# Altium PCB RFIN PCB.PcbDoc
Units mil, origin at the board's own origin, x right, y up, seen from the top; angles counter-clockwise.
Board outline 6000 x 4000 mil, 2 copper layers (Top Layer, Bottom Layer); 71 components, 44 nets, 178 pads, 0 vias.
Unrouted connection lines stored in the file: 120.
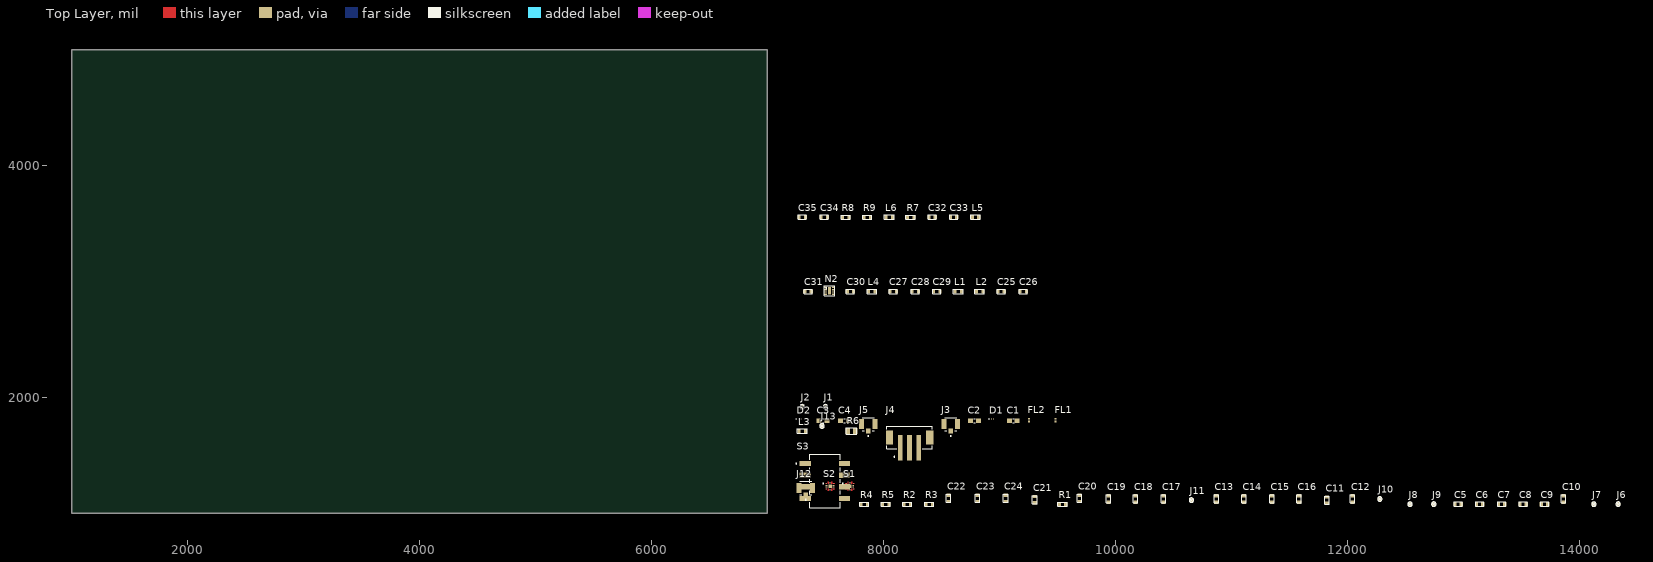
[diagram p0: Top Layer view]
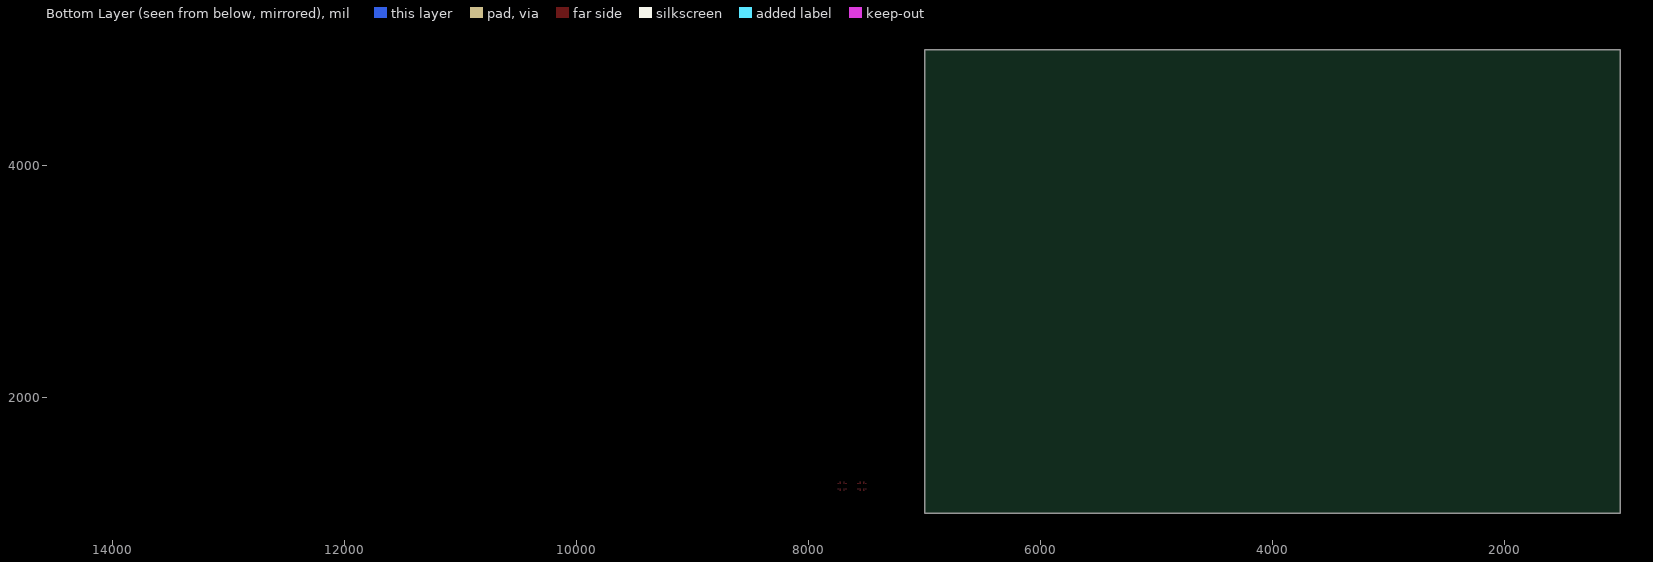
[diagram p1: Bottom Layer view, seen from below]

## Layer stack, top to bottom
Top Solder: solder mask 0.4, Solder Resist, Dk 3.5
Top Layer: signal copper 1.4
Dielectric 1: dielectric 12.6, FR-4, Dk 4.8
Bottom Layer: signal copper 1.4
Bottom Solder: solder mask 0.4, Solder Resist, Dk 3.5

## Board outline
1000,1000 7000,1000 7000,5000 1000,5000

## Design rules (kind name [scope] priority, off if disabled: settings)
Clearance [All] p1: gap=10 ignorepadtopadclearanceinfootprint=FALSE
PolygonConnect [All] p1: connectstyle=Relief reliefconductorwidth=10 reliefentries=4 polygonreliefangle="90 Angle" airgapwidth=10
RoutingVias [All] p1: holewidth=28 width=50 viastyle="Through Hole" minholewidth=28 minwidth=50 maxholewidth=28 maxwidth=50
SolderMaskExpansion [All] p1: expansion=4 istentingtop=FALSE
SupplyNets "Schematic Supply Nets_3" [InNet('3V3_IN')] p1: voltage=0.000
SupplyNets "Schematic Supply Nets_2" [InNet('5V_IN')] p2: voltage=0.000
SupplyNets "Schematic Supply Nets_1" [InNet('VDD_3V3')] p3: voltage=0.000
SupplyNets "Schematic Supply Nets" [InNet('GND')] p4: voltage=0.000
Width [All] p1: maxlimit=10 minlimit=10 preferedwidth=10
30 further rules are at their usual default settings.

## Classes and differential pairs
net class RF: NetC11_1 NetC11_2 NetC12_1 NetC12_2 NetC17_2 NetC18_1 NetC18_2 NetC19_1 NetC19_2 NetC20_1 NetC20_2 NetC22_2 NetC23_1 NetC23_2 NetC24_1 NetC24_2 NetC25_1 NetC25_2 NetC26_1 NetC26_2 NetC30_2 NetC31_2 NetC32_1 NetC32_2 NetC33_1 NetL5_1 NetR7_1
component class "RFOUT DaughterBoard": C1 C2 C3 C4 D1 D2 FL1 FL2 J1 J2 J3 J4 J5
component class FB: C5 C6 C7 C8 C9 C10 C11 C12 C13 C14 C15 C16 C17 C18 C19 C20 C21 C22 C23 C24 FL3 FL4 J6 J7 J8 J9 J10 J11 J12 N1 R1 R2 R3 R4 R5 S1 S2 S3
component class LNA: C25 C26 C27 C28 C29 C30 C31 C32 C33 C34 C35 J13 L1 L2 L3 L4 L5 L6 N2 R6 R7 R8 R9

## Components (designator, comment, footprint, x,y, rotation, side; value= is the part's Value field where it differs from the comment)
C1 "CC0603KRX5R9BB105" CAPC1608X90 9120,1800 r0 top
C2 "CC0603KRX5R9BB105" CAPC1608X90 8785,1800 r0 top
C3 "CC0603KRX5R9BB105" CAPC1608X90 7480,1800 r0 top
C4 "CC0603KRX5R9BB105" CAPC1608X90 7665,1800 r0 top
C5 "CAP_0603_100p" CAP_0603_UN1Q 12955,1080 r0 top value=100p
C6 "CAP_0603_1u_X7R" CAP_0603_UN1Q 13140,1080 r0 top value=1uF
C7 "CAP_0603_1u_X7R" CAP_0603_UN1Q 13330,1080 r0 top value=1uF
C8 "CAP_0603_1u_X7R" CAP_0603_UN1Q 13515,1080 r0 top value=1uF
C9 "CAP_0603_1u_X7R" CAP_0603_UN1Q 13700,1080 r0 top value=1uF
C10 "CAP_0603_100p" CAP_0603_UN1Q 13865,1125 r90 top value=100p
C11 "CAP_0603_100p" CAP_0603_UN1Q 11825,1115 r90 top value=100p
C12 "CAP_0603_100p" CAP_0603_UN1Q 12045,1125 r90 top value=100p
C13 "CAP_0603_100p" CAP_0603_UN1Q 10870,1125 r90 top value=100p
C14 "CAP_0603_100p" CAP_0603_UN1Q 11110,1125 r90 top value=100p
C15 "CAP_0603_100p" CAP_0603_UN1Q 11350,1125 r90 top value=100p
C16 "CAP_0603_100p" CAP_0603_UN1Q 11585,1125 r90 top value=100p
C17 "CAP_0603_100p" CAP_0603_UN1Q 10415,1125 r90 top value=100p
C18 "CAP_0603_100p" CAP_0603_UN1Q 10175,1125 r90 top value=100p
C19 "CAP_0603_100p" CAP_0603_UN1Q 9940,1125 r90 top value=100p
C20 "CAP_0603_100p" CAP_0603_UN1Q 9690,1130 r90 top value=100p
C21 "CAP_0603_NA" CAP_0603_UN1Q 9305,1120 r90 top value=NA
C22 "CAP_0603_NA" CAP_0603_UN1Q 8560,1130 r90 top value=NA
C23 "CAP_0603_100p" CAP_0603_UN1Q 8810,1130 r90 top value=100p
C24 "CAP_0603_100p" CAP_0603_UN1Q 9055,1130 r90 top value=100p
C25 "CAP_0603_1p" CAP_0603_UN1Q 9015,2915 r0 top value=1p
C26 "CAP_0603_1p" CAP_0603_UN1Q 9205,2915 r0 top value=1p
C27 "CAP_0603_1u_X7R" CAP_0603_UN1Q 8085,2915 r0 top value=1uF
C28 "CAP_0603_1u_X7R" CAP_0603_UN1Q 8275,2915 r0 top value=1uF
C29 "CAP_0603_1u_X7R" CAP_0603_UN1Q 8460,2915 r0 top value=1uF
C30 "CAP_0603_10p" CAP_0603_UN1Q 7715,2915 r0 top value=10p
C31 "CAP_0603_100p" CAP_0603_UN1Q 7350,2915 r0 top value=100p
C32 "CAP_0603_22p" CAP_0603_UN1Q 8420,3555 r0 top value=22p
C33 "CAP_0603_100p" CAP_0603_UN1Q 8605,3555 r0 top value=100p
C34 "CAP_0603_100p" CAP_0603_UN1Q 7490,3555 r0 top value=100p
C35 "CAP_0603_100p" CAP_0603_UN1Q 7300,3555 r0 top value=100p
D1 "TESDL5V0B12P1Q0_M7G" DFN61X31X34-2N 8940,1815 r0 top
D2 "TESDL5V0B12P1Q0_M7G" DFN61X31X34-2N 7280,1815 r0 top
FL1 "BLM03PX330SZ1D" BEADC0603X33N 9485,1805 r90 top
FL2 "BLM03PX330SZ1D" BEADC0603X33N 9255,1805 r90 top
J1 "Testpoint, Surface, 1.0mm" TP_1mm_UN1Q 7500,1920 r0 top
J2 "Testpoint, Surface, 1.0mm" TP_1mm_UN1Q 7300,1920 r0 top
J3 "RSP-122811-01" SAMTEC_RSP-122811-01 8580,1770 r0 top
J4 "B3B-PH-SM4-TB(LF)(SN)" JST_B3B-PH-SM4-TB(LF)(SN) 8225,1655 r0 top
J5 "RSP-122811-01" SAMTEC_RSP-122811-01 7870,1770 r0 top
J6 "Testpoint, Surface, 1.0mm" TP_1mm_UN1Q 14335,1080 r0 top
J7 "Testpoint, Surface, 1.0mm" TP_1mm_UN1Q 14125,1080 r0 top
J8 "Testpoint, Surface, 1.0mm" TP_1mm_UN1Q 12540,1080 r0 top
J9 "Testpoint, Surface, 1.0mm" TP_1mm_UN1Q 12745,1080 r0 top
J10 "Testpoint, Surface, 1.0mm" TP_1mm_UN1Q 12280,1125 r90 top
J11 "Testpoint, Surface, 1.0mm" TP_1mm_UN1Q 10655,1115 r90 top
J12 "RSP-122811-01" SAMTEC_RSP-122811-01 7330,1220 r0 top
J13 "Testpoint, Surface, 1.0mm" TP_1mm_UN1Q 7470,1755 r90 top
L1 "IND_0603_30n" IND_0603_UN1Q 8645,2915 r0 top value=30nH
L2 "IND_0603_30n" IND_0603_UN1Q 8830,2915 r0 top value=30nH
L3 "IND_0603_68nH_Coilcraft_DC" IND_0603_Coilcraft_0603DC 7300,1710 r0 top value="68 nH"
L4 "IND_0603_3n" IND_0603_UN1Q 7900,2915 r0 top value=3nH
L5 "IND_0603_5_6n" IND_0603_UN1Q 8795,3555 r0 top value=5.6nH
L6 "IND_0603_25n" IND_0603_UN1Q 8050,3555 r0 top value=25nH
N2 "QPL9095" DFN8_P50_200x200x95_QORVO 7535,2920 r0 top
R1 "RES_0603_0R" RES_0603_UN1Q 9545,1080 r0 top value=0R
R2 "RES_0603_1k" RES_0603_UN1Q 8205,1080 r0 top value=1k
R3 "RES_0603_1k" RES_0603_UN1Q 8395,1080 r0 top value=1k
R4 "RES_0603_1k" RES_0603_UN1Q 7835,1080 r0 top value=1k
R5 "RES_0603_1k" RES_0603_UN1Q 8020,1080 r0 top value=1k
R6 "RES_0805_0R0" RES_0805_UN1Q 7725,1710 r0 top value=0R
R7 "RES_0603_10R" RES_0603_UN1Q 8235,3555 r0 top value=10R
R8 "RES_0603_470R" RES_0603_UN1Q 7675,3555 r0 top value=470R
R9 "RES_0603_470R" RES_0603_UN1Q 7860,3555 r0 top value=470R
S1 "SKY13575-639LF" SW_SKY13575-639LF 7710,1235 r0 top
S2 "SKY13575-639LF" SW_SKY13575-639LF 7540,1235 r0 top
S3 "219-4MST" SW_219-4MST 7495,1280 r0 top

## Footprints (in the part's own frame and the unit in brackets; to place one, negate y for a bottom-side part, rotate by r counter-clockwise, add the part's x,y. Pads: shape width x height; smd on the part's side, far side on the other; paste and mask are expansions set on the pad)
BEADC0603X33N [mm]
  rect 0.38x0.4 smd paste+0 mask+0.102: 1(-0.281,0) 2(0.281,0)
  body extent -0.3,-0.15 0.3,0.15, height 0.33
CAP_0603_UN1Q [mm] "Chip Capacitor 0603"
  rect 0.7x0.9 smd paste+0 mask+0.05: 1(-0.7,0) 2(0.7,0)
  silkscreen extent -0.87,-0.5 0.87,0.5, body extent -0.8,-0.45 0.8,0.45, height 1
CAPC1608X90 [mm]
  rect 1.1x1 smd: 1(-0.85,0) 2(0.85,0)
  silkscreen extent -0.15,-0.45 0.15,0.45, body extent -0.8,-0.4 0.8,0.4, height 0.9
DFN8_P50_200x200x95_QORVO [mm] "DFN8 2x2mm Pitch 0.5 mm"
  rect 0.66x0.3 smd mask+0.05: 1(-0.88,0.75) 2(-0.88,0.25) 3(-0.88,-0.25) 4(-0.88,-0.75) 5(0.88,-0.75) 6(0.88,-0.25) 7(0.88,0.25) 8(0.88,0.75)
  rect 0.7x1.6 smd paste+0 mask+0.05: 9(0,0)
  silkscreen extent -1.1,-1.05 1.1,1.05, body extent -1.05,-1 1.05,1, height 0.95
DFN61X31X34-2N [mm]
  rect 0.18x0.27 smd: 1(-0.2,0) 2(0.2,0)
  silkscreen extent -0.85,-0.05 -0.75,0.05
IND_0603_Coilcraft_0603DC [mm] "Chip Inductor, 1.6x0.8mm"
  rect 0.7x0.9 smd mask+0.07: 1(-0.7,0) 2(0.7,0)
  silkscreen extent -1.05,-0.48 1.05,0.48, body extent -0.81,-0.37 0.81,0.37, height 0.89
IND_0603_UN1Q [mm] "Chip Inductor, 1.6x0.8mm"
  rect 0.7x0.9 smd mask+0.07: 1(-0.7,0) 2(0.7,0)
  silkscreen extent -1.05,-0.48 1.05,0.48, body extent -1.05,-0.48 1.05,0.48, height 0.8
JST_B3B-PH-SM4-TB(LF)(SN) [mm]
  rect 1x5.5 smd: 1(-2,-2.25) 2(0,-2.25) 3(2,-2.25)
  rect 1.6x3 smd: S1(-4.4,0) S2(4.4,0)
  silkscreen extent -4.97,-4.35 4.97,2.5, body extent -4.97,-2.5 4.97,4.5, height 6.6
RES_0603_UN1Q [mm] "Chip Resistor, 1.6x0.8mm"
  rect 0.7x0.9 smd mask+0.06: 1(-0.7,0) 2(0.7,0)
  silkscreen extent -1.02,-0.43 1.02,0.43, body extent -0.8,-0.4 0.8,0.4, height 0.45
RES_0805_UN1Q [mm] "Resistor 0805"
  rect 0.95x1.35 smd paste+0 mask+0.06: 1(-0.8,0) 2(0.8,0)
  silkscreen extent -1.15,-0.7 1.15,0.7, body extent -1.1,-0.67 1.1,0.67, height 0.7
SAMTEC_RSP-122811-01 [mm]
  rect 1x1.05 smd paste+0 mask+0.102: 1(0,-1.525)
  rect 1.05x2.2 smd paste+0 mask+0.102: G1(-1.475,0) G2(1.475,0)
  silkscreen extent -1.3,-2.7 1.3,1.45
SW_219-4MST [mm]
  rect 2.44x1.13 smd paste+0 mask+0.102: 1(-4.3,3.81) 2(-4.3,1.27) 3(-4.3,-1.27) 4(-4.3,-3.81) 5(4.3,-3.81) 6(4.3,-1.27) 7(4.3,1.27) 8(4.3,3.81)
  silkscreen extent -6.35,-5.81 3.35,5.81, body extent -4.95,-5.81 4.95,5.81, height 4.58
SW_SKY13575-639LF [mm]
  rect 0.05x0.05 smd paste-1 mask+0: 1(-0.8,0.6) 4(-0.8,-0.6) 5(-0.4,-0.772) 7(0.4,-0.772) 8(0.8,-0.6) 11(0.8,0.6) 12(0.4,0.772) 14(-0.4,0.772)
  rect 0.4x0.2 smd: 2(-0.772,0.2) 3(-0.772,-0.2) 9(0.772,-0.2) 10(0.772,0.2)
  rect 0.2x0.4 smd: 6(0,-0.772) 13(0,0.772)
  rect 0.74x0.74 smd: 15(0,0)
  Top Layer region: 0.5,0.752 0.425,0.572 0.3,0.572 0.3,0.972 0.5,0.972
  Top Layer region: 0.972,0.5 0.627,0.5 0.627,0.548 0.691,0.7 0.972,0.7
  Top Layer region: -0.3,0.572 -0.425,0.572 -0.5,0.752 -0.5,0.972 -0.3,0.972
  Top Layer region: -0.3,-0.972 -0.5,-0.972 -0.5,-0.752 -0.425,-0.572 -0.3,-0.572
  Top Layer region: 0.5,-0.752 0.5,-0.972 0.3,-0.972 0.3,-0.572 0.425,-0.572
  Top Layer region: -0.627,-0.548 -0.691,-0.7 -0.972,-0.7 -0.972,-0.5 -0.627,-0.5
  Top Layer region: -0.627,0.548 -0.627,0.5 -0.972,0.5 -0.972,0.7 -0.691,0.7
  Top Layer region: 0.972,-0.7 0.691,-0.7 0.627,-0.548 0.627,-0.5 0.972,-0.5
  silkscreen extent -1.62,0.5 -1.42,0.7
TP_1mm_UN1Q [mm] "Test Point, Circular, 1.0 mm"
  round 1 smd paste-1 mask+0.06: 1(0,0)
  silkscreen extent -0.5,-0.5 0.5,0.5, body extent -0.5,-0.5 0.5,0.5, height 0.02

## Part data
C1 C2 C3 C4: "1 ÂµF Â±10% 50V Ceramic Capacitor X5R 0603 (1608 Metric)", Package="0603 Yageo", Check_prices=https://www.snapeda.com/parts/CC0603KRX5R9BB105/Yageo/view-part/?ref=eda, MF=Yageo, MP=CC0603KRX5R9BB105, SnapEDA_Link=https://www.snapeda.com/parts/CC0603KRX5R9BB105/Yageo/view-part/?ref=snap
C5 C10 C11 C12 C13 C14 C15 C16 C17 C18 C19 C20 C23 C24 C25 C26 C30 C31 C32 C33 C34 C35: library part CMP-001-000378-11, "CAP", Manufacturer=Murata, Manufacturer Part Number=GCM188R71H102KA37J, Operating temperature range="-55 ... +125°C", Package=0603, Temperature characteristics=X7R, Tolerance=+/-10%, Voltage=50V, Alternative component=Allowed, Component Type=Capacitor, ComponentLink1Description=1_Datasheet, ComponentLink2Description="2_Product page", ComponentLink3Description=3_X-information, ComponentLink4Description=4_X-information, Creation date=20210927, ECCN=EAR99, HasBeenBuilt=TBD, Part Number=GCM188R71H102KA37J, RoHS=RoHS3, Sort order=306, Source=RLC_UN1Q.SchLib, System=RLC
C6 C7 C8 C9 C27 C28 C29: library part CMP-001-000333-14, "CAP", Manufacturer="Taiyo Yuden", Manufacturer Part Number=UMK107AB7105KA-T, Package=0603, Temperature characteristics=X7R, Tolerance=+/-20%, Voltage=50V, Alternative component=Allowed, Component Type=Capacitor, ComponentLink1Description=1_Datasheet, ComponentLink2Description="2_Product page", ComponentLink3Description=3_X-information, ComponentLink4Description=4_X-information, Creation date=20210917, HasBeenBuilt=TBD, Part Number=UMK107AB7105KA-T, Sort order=306, Source=RLC_UN1Q.SchLib, System=RLC
C21 C22: library part CMP-001-000259-10, "Not Assembled - CAP", Package=0603, Component Type=Capacitor, ComponentLink1Description=1_Datasheet, ComponentLink2Description="2_Product page", ComponentLink3Description=3_X-information, ComponentLink4Description=4_X-information, Creation date=20190101, HasBeenBuilt=TBD, Sort order=999, Source=RLC_UN1Q.SchLib, System=RLC
D1 D2 J3 J5 J12: Package=None, Availability=Unavailable, Price=None
  D1 D2: MF="{'manufacturer': u'Taiwan Semiconductor'}", MP=TESDL5V0B12P1Q0_M7G
  J3 J5 J12: MF="{'manufacturer': u'Samtec Inc.'}", MP=RSP-122811-01
FL1 FL2: "33 Ohms @ 100 MHz 1 Power Line Ferrite Bead 0201 (0603 Metric) 1.5A 55mOhm", Package="0603 Murata", Check_prices=https://www.snapeda.com/parts/BLM03PX330SZ1D/Murata/view-part/?ref=eda, MF=Murata, MP=BLM03PX330SZ1D, SnapEDA_Link=https://www.snapeda.com/parts/BLM03PX330SZ1D/Murata/view-part/?ref=snap
J1 J2 J6 J7 J8 J9 J10 J11 J13: library part CMP-001-000153-12, "Testpoint 1.0mm", Part Number="TP 1mm", ClassName=SMALL, Component Type="Test Point", ComponentLink1Description=1_Datasheet, ComponentLink2Description="2_Product page", ComponentLink3Description=3_X-information, ComponentLink4Description=4_X-information, Creation date=20200101, Design Item ID=TP_1mm, HasBeenBuilt=-, Sort order=-, Source=Conn_UN1Q.SchLib, System="Test Point"
J4: "Connector Header Surface Mount 3 position 0.079 (2.00mm)", Package="NON STANDARD-3 JST", Availability="In Stock", Check_prices=https://www.snapeda.com/parts/B3B-PH-SM4-TB(LF)(SN)/JST+Sales+America+Inc./view-part/?ref=eda, MF="JST Sales", MP=B3B-PH-SM4-TB(LF)(SN), Price=None, SnapEDA_Link=https://www.snapeda.com/parts/B3B-PH-SM4-TB(LF)(SN)/JST+Sales+America+Inc./view-part/?ref=snap
L1 L2 L4 L5 L6: library part CMP-034-000025-11, Manufacturer=TDK, Manufacturer Part Number=MLZ1608M100WTD25, Package=0603, Tolerance=10%, Component Type=Inductor, ComponentLink1Description=1_Datasheet, ComponentLink1URL=https://product.tdk.com/en/search/inductor/inductor/smd/info?part_no=MLZ1608M100WTD25, ComponentLink2Description="2_Product page", ComponentLink3Description=3_X-information, ComponentLink4Description=4_X-information, Creation date=20230111, Desc2=inductor_10uH_1R_250mA, Dimensions WxLxH="1.6 x 0.8 x 0.8 +-0.15", HasBeenBuilt=False, HasBeenChecked=False, Sort order=346
L3: library part CMP-001-001491-1, "IND High Q Ceramic Chip", Manufacturer=Coilcraft, Manufacturer Part Number=0603DC-68NXJRW, Operating temperature range="-55℃ to 125℃", Package=0603, Tolerance=10%, Component Type=Inductor, ComponentLink1Description=1_Datasheet, ComponentLink1URL=https://www.coilcraft.com/en-us/products/rf/ceramic-core-chip-inductors/0603-(1608)/0603dc/?skuId=30647, ComponentLink2Description="2_Product page", ComponentLink3Description=3_X-information, ComponentLink4Description=4_X-information, Creation date=20250807, Dimensions WxLxH="1.7 x 0.99 x 0.89", ECCN=EAR99, Part Number=0603DC-68NXJRW, RoHS="RoHS 3", Sort order=346, System=RLC
N2: library part CMP-001-001198-7, "Ultra Low-Noise, Bypass LNA", Manufacturer=Qorvo, Manufacturer Part Number=QPL9095SR, Operating temperature range="-40°C ... 105°C", Package=DFN50, ClassName=BIG, Component Type="RF IC", ComponentLink1Description=1_Datasheet, ComponentLink1URL=https://www.qorvo.com/products/d/da006183, ComponentLink2Description="2_Product page", ComponentLink2URL=https://www.qorvo.com/products/p/QPL9095, ComponentLink3Description=3_X-information, ComponentLink3URL=https://www.qorvo.com/products/d/da006076, ComponentLink4Description=4_X-information, Creation date=20240607, Dimensions WxLxH="2 x 2 x 0.95", Part Number=QPL9095, Sort order=721, System=RF
R1: library part CMP-001-000441-13, "RES", Manufacturer=YAGEO, Package=0603, Part Number=RC0603FR-070RL, Power Rating=1/10W, Tolerance=5%, Alternative component=Allowed, Component Type=Resistor, ComponentLink1Description=1_Datasheet, ComponentLink2Description="2_Product page", ComponentLink3Description=3_X-information, ComponentLink4Description=4_X-information, Creation date=20190101, HasBeenBuilt=TBD, Sort order=326, Source=RLC_UN1Q.SchLib, System=RLC
R2 R3 R4 R5 R7 R8 R9: library part CMP-001-000441-13, "RES", Manufacturer=YAGEO, Package=0603, Power Rating=1/10W, Tolerance=5%, Alternative component=Allowed, Component Type=Resistor, ComponentLink1Description=1_Datasheet, ComponentLink2Description="2_Product page", ComponentLink3Description=3_X-information, ComponentLink4Description=4_X-information, Creation date=20190101, HasBeenBuilt=TBD, Sort order=326, Source=RLC_UN1Q.SchLib, System=RLC
R6: library part CMP-001-000676-11, "RES 0805 0R.", Manufacturer=Susumu, Manufacturer Part Number=KRL1220E-M-R010-F, Operating temperature range="-55C ... +155C", Package=0805, Power Rating=1/2W, Tolerance=1%, Component Type=Resistor, ComponentLink1Description=1_Datasheet, ComponentLink1URL=https://www.susumu.co.jp/common/pdf/n_catalog_partition09_en.pdf, ComponentLink2Description="2_Product page", ComponentLink3Description=3_X-information, ComponentLink4Description=4_X-information, Creation date=20210928, HasBeenBuilt=False, Sort order=328, Source=RLC_UN1Q.SchLib, System=RLC
S1 S2: "RF Switch IC 802.11a/b/g/n/ac SP4T 6 GHz 50Ohm 14-QFN (1.6x1.6)", Package="QFN-14 Skyworks Solutions", Check_prices=https://www.snapeda.com/parts/SKY13575-639LF/Skyworks+Solution%252C+Inc./view-part/?ref=eda, MF="Skyworks Solutions", MP=SKY13575-639LF, SnapEDA_Link=https://www.snapeda.com/parts/SKY13575-639LF/Skyworks+Solution%252C+Inc./view-part/?ref=snap
S3: "Dip Switch SPST 4 Position Surface Mount Slide (Standard) Actuator 100mA 20VDC", Package=None, Check_prices=https://www.snapeda.com/parts/219-4MST/CTS+Components/view-part/?ref=eda, MF="CTS Electronic Components", MP=219-4MST, SnapEDA_Link=https://www.snapeda.com/parts/219-4MST/CTS+Components/view-part/?ref=snap

## Nets (pads, with @x,y where several pads share a name; then routed paths per layer and width w, separated by ;. In a path a pad name is that pad's centre, name@x,y a point inside that pad or via, vN(x,y) a via of type N, cw(c..) or ccw(c..) an arc to the next point about the centre after c; other vN are vias at no path point)
3V3_IN: C1.1 C2.1 D1.2 FL1.1 J4.1
5V_IN: C3.1 C4.1 D2.2 FL2.1 J4.3
GND: C1.2 C2.2 C3.2 C4.2 C5.2 C6.1 C7.1 C8.1 C9.1 C10.2 C13.2 C14.2 C15.2 C16.2 C21.1 C22.1 C27.1 C28.1 C29.1 C30.1 C34.1 C35.1 D1.1 D2.1 J4.2 L4.1 L6.1 N2.1 N2.6 N2.9 R8.1 R9.1 S1.1 S1.3 S1.4 S1.6 S1.11 S1.13 S1.15 S2.1 S2.3 S2.4 S2.6 S2.11 S2.13 S2.15 S3.5 S3.6 S3.7 S3.8
NetC11_1: C11.1
NetC11_2: C11.2 S2.14
NetC12_1: C12.1 S1.14
NetC12_2: C12.2
NetC13_1: C13.1 J11.1 R2.1 S2.9 S3.4
NetC14_1: C14.1 J8.1 R4.1 S2.8 S3.3
NetC15_1: C15.1 J9.1 R5.1 S1.8 S3.1
NetC16_1: C16.1 R3.1 S1.9 S3.2
NetC17_1: C17.1 S1.12
NetC17_2: C17.2
NetC18_1: C18.1
NetC18_2: C18.2 S2.12
NetC19_1: C19.1
NetC19_2: C19.2 S1.2
NetC20_1: C20.1 S2.2
NetC20_2: C20.2 C21.2 R1.2
NetC22_2: C22.2 R1.1
NetC23_1: C23.1
NetC23_2: C23.2 S2.7
NetC24_1: C24.1 S1.7
NetC24_2: C24.2
NetC25_1: C25.1 L1.1
NetC25_2: C25.2 C31.1
NetC26_1: C26.1
NetC26_2: C26.2 L2.2
NetC27_2: C27.2 C28.2 C29.2 J13.1 L3.2 R6.2
NetC30_2: C30.2 L1.2 L2.1 L4.2
NetC31_2: C31.2 L5.2
NetC32_1: C32.1 C33.2 L6.2
NetC32_2: C32.2 R7.2 R9.2
NetC33_1: C33.1 N2.7
NetC34_2: C34.2 N2.4
NetC35_2: C35.2 N2.5
NetFL2_2: FL2.2 J2.1
NetJ3_G1: J3.G1 J3.G2
NetJ5_G1: J5.G1 J5.G2
NetJ12_G1: J12.G1 J12.G2
NetL3_1: L3.1 N2.8
NetL5_1: L5.1 N2.2
NetR7_1: R7.1 R8.2
VDD_3V3: C5.1 C6.2 C7.2 C8.2 C10.1 FL1.2 J1.1 J6.1 J7.1 R2.2 R3.2 R4.2 R5.2 R6.1 S1.10 S2.10
pads on no net: C9.2 J3.1 J4.S1 J4.S2 J5.1 J10.1 J12.1 N2.3 S1.5 S2.5